# EAGLE board ring_mod_v0.1 (EAGLE 5.10)
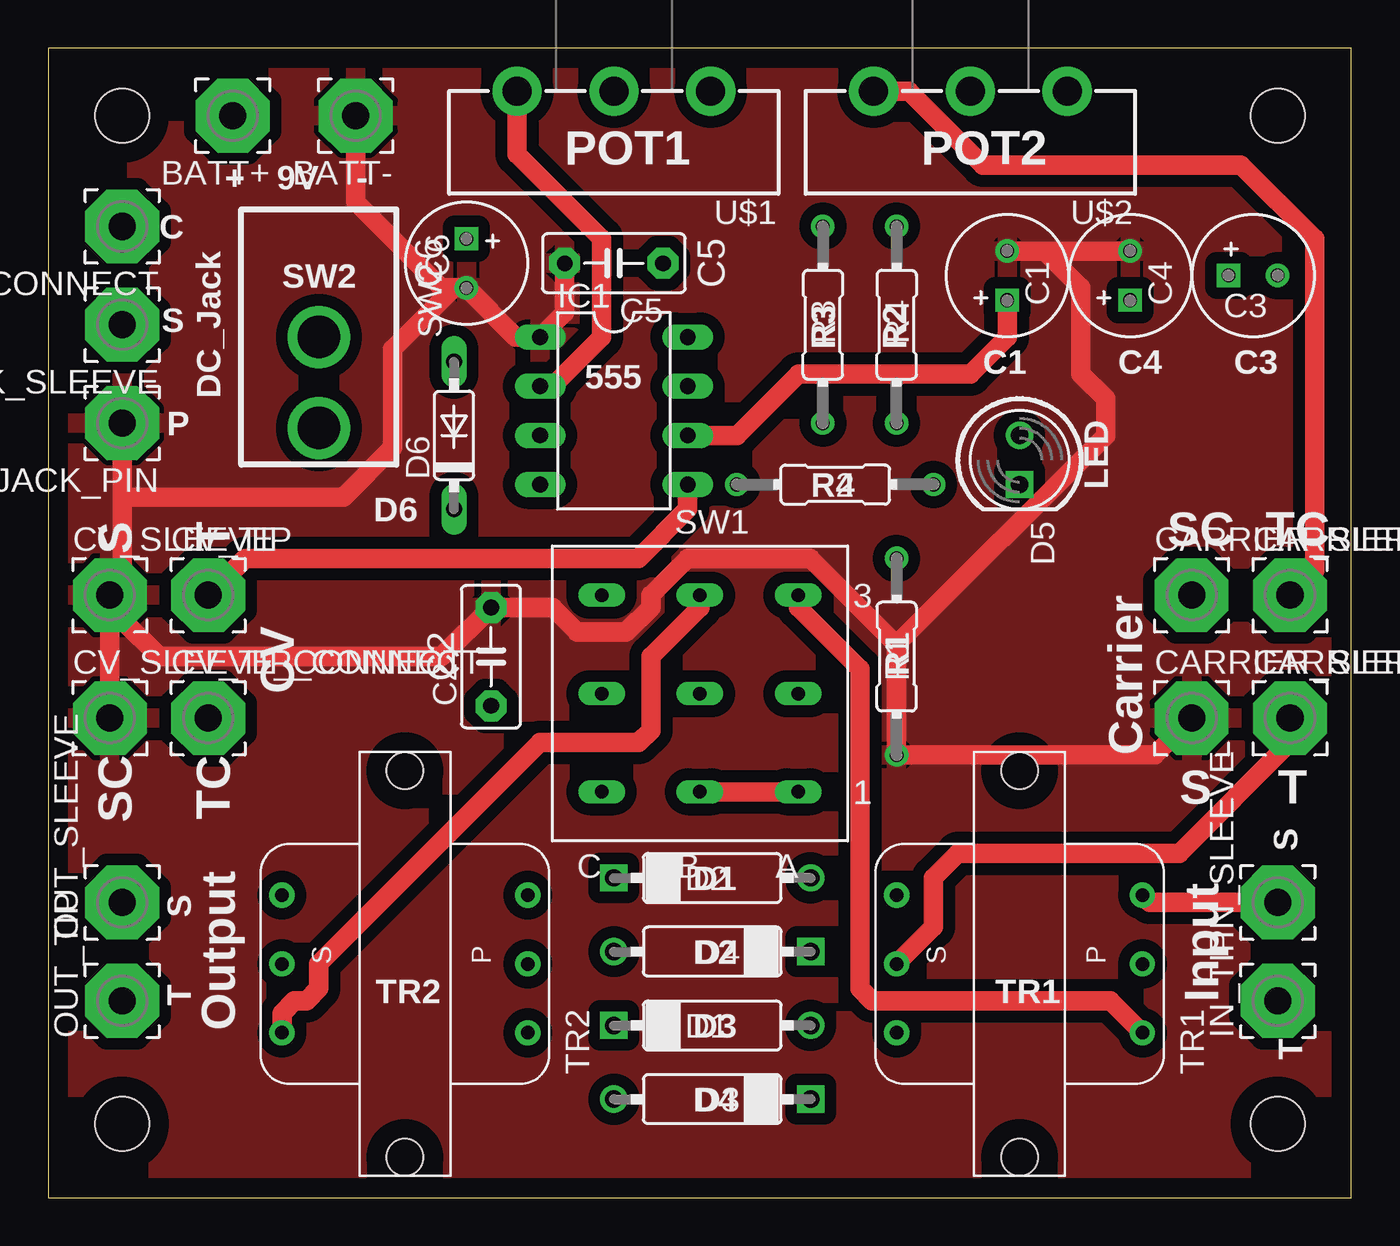
[diagram p0: board, top side]
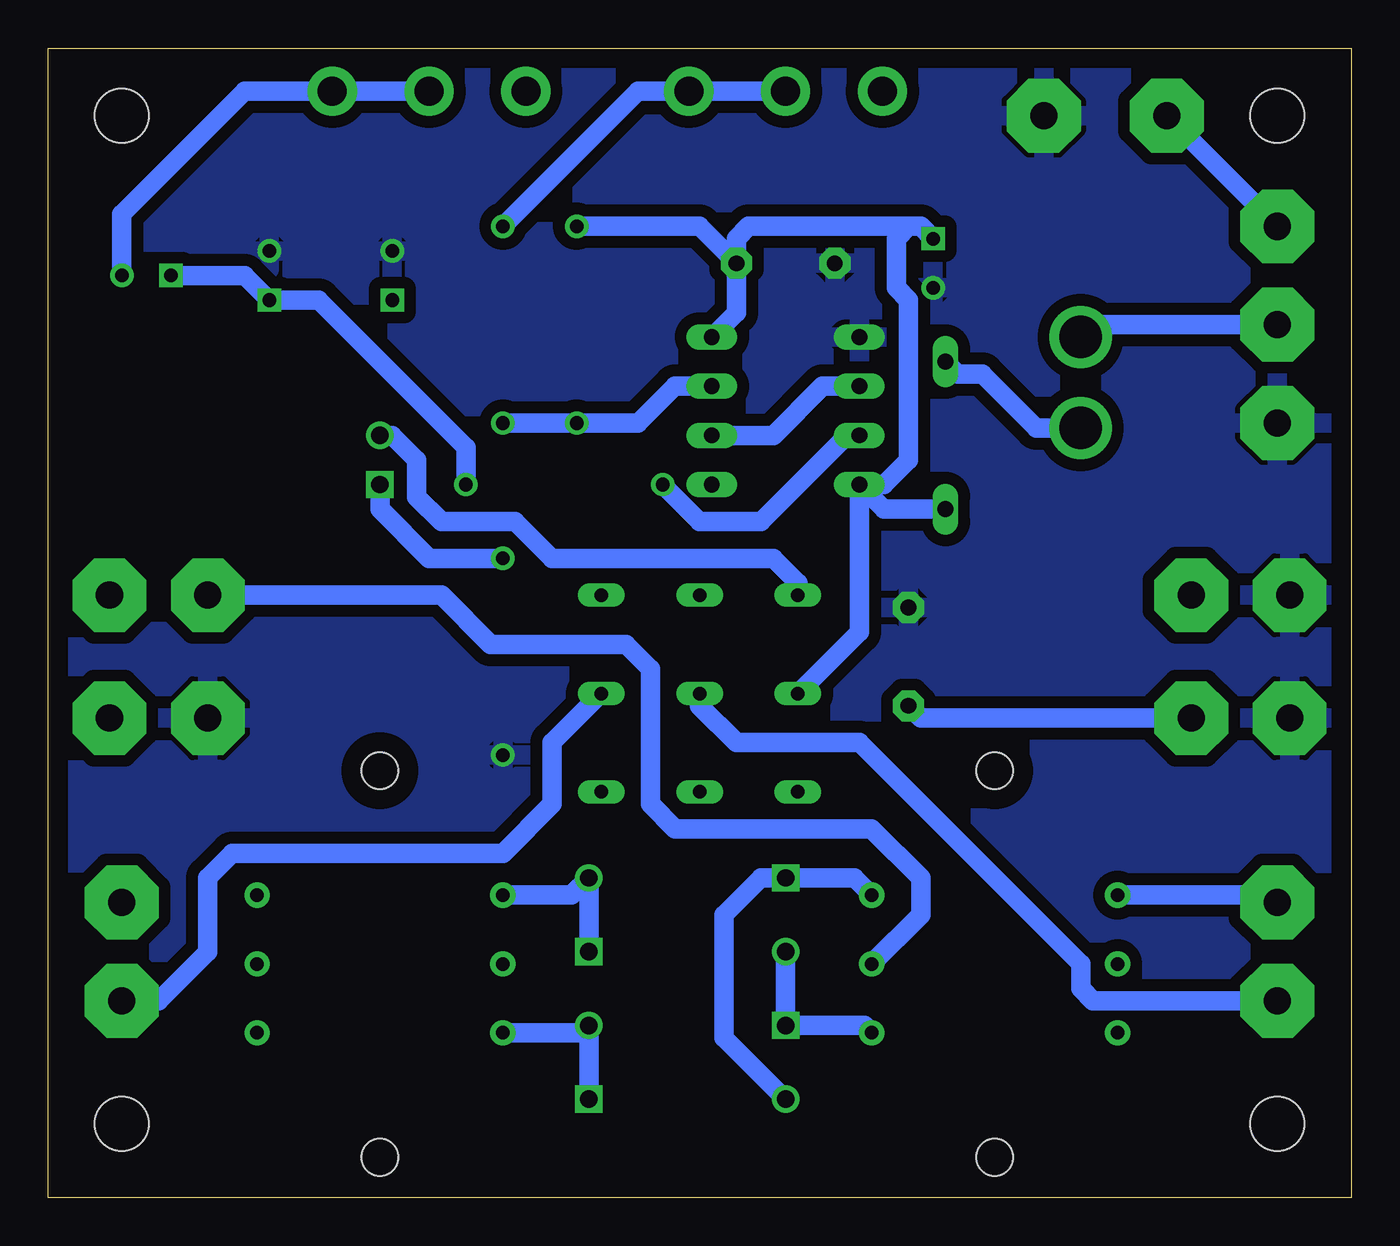
[diagram p1: board, bottom side, seen from below]

Size 67.29 x 59.36 mm. Coordinates in mm from the lower left corner, seen from the top.
Outline: 0,0 67.29,0 67.29,59.36 0,59.36 0,0
Copper layers (1*16): Top 0.035mm / dielectric 1.5mm / Bottom 0.035mm
Design rules "default": minimum track width 10mil, minimum drill 24mil, track to track 8mil, track to pad 8mil, pad to pad 8mil, via to via 8mil, smd to smd 8mil, copper to edge 40mil, drill to drill 8mil, minimum pad ring 10mil, minimum via ring 8mil, stop-mask expansion 4mil, vias tented up to drill 0mil, thermal gap 10mil
Holes 2.8 mm at 3.81,3.81 3.81,55.88 63.5,3.81 63.5,55.88

## Footprints (pad centres in the part's own frame; a part is rotated, then mirrored left to right if it is on the bottom)
3,81/1,4 = drill 1.397 pad 3.81 octagon: 1 0,0
063_025 = drill 0.7 square: + -1.27,0 | drill 0.7 round: - 1.27,0
C5B3 = drill 0.813 pad 1.6 octagon: 1 -2.54,0; 2 2.54,0
DO07 = drill 0.9 round: A 5.08,0 | drill 0.9 square: C -5.08,0
LED5MM = drill 0.9 round: A -1.27,0 | drill 0.9 square: K 1.27,0
DO35-7 = drill 0.813 long: A 3.81,0; C -3.81,0
DIL08 = drill 0.813 long: 1 -3.81,-3.81; 2 -1.27,-3.81; 3 1.27,-3.81; 4 3.81,-3.81; 5 3.81,3.81; 6 1.27,3.81; 7 -1.27,3.81; 8 -3.81,3.81
R0207/4 = drill 0.7 round: 1 -5.08,0; 2 5.08,0
3PDT = drill 0.7 long: A1 -5.08,5.08; A2 -5.08,0; A3 -5.08,-5.08; B1 0,5.08; B2 0,0; B3 0,-5.08; C1 5.08,5.08; C2 5.08,0; C3 5.08,-5.08
SPST_TOGGLE_SWITCH = drill 2.2 round: A 0,0; B 4.7,0
42TM = drill 0.7 pad 1.3 round: 1 -3.556,-6.35; 2 0,-6.35; 3 3.556,-6.35; 4 3.556,6.35; 5 0,6.35; 6 -3.556,6.35 | hole 1.9: -9.982,0; 9.982,0
POT_ALPHA_RV16AF-20 = drill 1.5 pad 2.54 round: 1 -5,0; 2 0,0; 3 5,0

## Placement (x,y rotation side)
BATT+  [3,81/1,4]  9.53,55.88 180 top
BATT-  [3,81/1,4]  15.88,55.88 180 top
C1  [063_025]  49.53,47.62 90 top
C2  [C5B3]  22.86,27.94 90 top
C3  [063_025]  62.23,47.62 0 top
C4  [063_025]  55.88,47.62 90 top
C5  [C5B3]  29.21,48.26 180 top
C6  [063_025]  21.59,48.26 270 top
CARRIER_SLEEVE  [3,81/1,4]  59.05,24.77 0 top
CARRIER_SLEEVE_CONNECT  [3,81/1,4]  59.05,31.11 0 top
CARRIER_TIP  [3,81/1,4]  64.14,24.77 0 top
CARRIER_TIP_CONNECT  [3,81/1,4]  64.14,31.11 0 top
CV_SLEEVE  [3,81/1,4]  3.17,31.11 0 top
CV_SLEEVE_CONNECT  [3,81/1,4]  3.17,24.77 0 top
CV_TIP  [3,81/1,4]  8.26,31.11 0 top
CV_TIP_CONNECT  [3,81/1,4]  8.26,24.77 0 top
D1  [DO07]  34.29,8.89 0 top
D2  [DO07]  34.29,16.51 0 top
D3  [DO07]  34.29,5.08 180 top
D4  [DO07]  34.29,12.7 180 top
D5  LED5MM  [LED5MM]  50.16,38.1 270 top
D6  1N4148DO35-7  [DO35-7]  20.95,39.37 90 top
DC_JACK_CONNECT  [3,81/1,4]  3.81,50.16 180 top
DC_JACK_PIN  [3,81/1,4]  3.81,40.01 180 top
DC_JACK_SLEEVE  [3,81/1,4]  3.81,45.09 180 top
IC1  ICM7555  [DIL08]  29.21,40.64 270 top
IN_SLEEVE  [3,81/1,4]  63.5,15.24 90 top
IN_TIP  [3,81/1,4]  63.5,10.16 90 top
OUT_SLEEVE  [3,81/1,4]  3.81,15.24 90 top
OUT_TIP  [3,81/1,4]  3.81,10.16 90 top
R1  [R0207/4]  43.81,27.94 90 top
R2  [R0207/4]  40.64,36.83 0 top
R3  [R0207/4]  40.01,45.09 270 top
R4  [R0207/4]  43.81,45.09 270 top
SW1  3PDT  [3PDT]  33.66,26.04 180 top
SW2  SPST_SWITCH  [SPST_TOGGLE_SWITCH]  13.97,44.45 270 top
TR1  42TM018  [42TM]  50.16,12.06 90 top
TR2  42TM018  [42TM]  18.41,12.06 90 top
U$1  [POT_ALPHA_RV16AF-20]  29.21,57.15 180 top
U$2  [POT_ALPHA_RV16AF-20]  47.62,57.15 180 top

## Library data of the parts
BATT+ BATT- CARRIER_SLEEVE CARRIER_SLEEVE_CONNECT CARRIER_TIP CARRIER_TIP_CONNECT CV_SLEEVE CV_SLEEVE_CONNECT CV_TIP CV_TIP_CONNECT DC_JACK_CONNECT DC_JACK_PIN DC_JACK_SLEEVE IN_SLEEVE IN_TIP OUT_SLEEVE OUT_TIP = wirepad
C1 C3 C4 C6 = gm-caps-electro-pol
C2 C5 = capacitor-wima
D1-D5 = gm-diodes
D6 = diode
IC1 = maxim
R1-R4 = gm-resistors
SW1 = gm-switches
SW2 = 00_steve
TR1 TR2 = trafo-xicon
U$1 U$2 = SparkFun

## Nets
GND: BATT-.1 C1.- C2.2 C4.- C5.2 C6.- CARRIER_SLEEVE.1 CV_SLEEVE.1 CV_SLEEVE_CONNECT.1 DC_JACK_PIN.1 IC1.1 R1.1
N$1: D1.A D3.C TR1.6
N$2: D1.C D4.A TR2.1
N$3: D2.C D3.A TR2.3
N$4: D2.A D4.C TR1.4
N$5: CARRIER_SLEEVE_CONNECT.1 TR2.2
N$6: CARRIER_TIP.1 TR1.5
N$7: IN_TIP.1 SW1.A2
N$8: OUT_TIP.1 SW1.B2
N$9: OUT_SLEEVE.1 TR2.4
N$10: SW1.B3 TR2.6
N$11: CARRIER_TIP_CONNECT.1 U$2.3
N$12: SW1.A3 TR1.1
N$13: IN_SLEEVE.1 TR1.3
N$14: D5.K R1.2
N$15: C1.+ IC1.2 IC1.6 U$1.3
N$16: CV_TIP.1 IC1.5
N$17: IC1.3 R2.1
N$18: IC1.7 R3.2 R4.2
N$19: C2.1 CV_TIP_CONNECT.1
N$20: C3.+ C4.+ R2.2
N$21: DC_JACK_SLEEVE.1 SW2.A
N$22: R4.1 U$1.1 U$1.2
N$23: BATT+.1 DC_JACK_CONNECT.1
N$24: D6.A SW2.B
N$25: C3.- U$2.1 U$2.2
N$26: D5.A SW1.C3
SIGNAL_BYPASS: SW1.A1 SW1.B1
VCC: C5.1 C6.+ D6.C IC1.4 IC1.8 R3.1 SW1.C2

## Tracks (layer width: path | path; a pad name or v marks a point on that pad's centre or on a via)
GND
  Top 1.016: 3.81,31.75 3.81,36.2 | 3.81,36.2 DC_JACK_PIN.1 | 3.81,31.75 CV_SLEEVE.1 CV_SLEEVE_CONNECT.1 | 3.81,31.75 3.81,29.84 5.71,27.94 20.32,27.94 C2.2 26.04,30.48 27.3,29.21 29.84,29.21 31.11,30.48 31.11,31.11 33.02,33.02 39.37,33.02 43.81,28.57 | C5.2 26.67,45.72 IC1.1 24.13,44.45 C6.- | C6.- 20.32,46.99 15.88,51.44 BATT-.1 | C4.- C1.- 51.44,48.9 53.34,46.99 53.34,42.55 54.61,41.27 54.61,39.37 43.81,28.57 | CARRIER_SLEEVE.1 57.15,22.86 R1.1 43.81,28.57 | C6.- 20.95,46.99 17.78,43.81 17.78,38.73 15.24,36.2 3.81,36.2
  pour Top (isolate 0.61): 0,59.05 67.31,59.05 67.31,0 0,0
  pour Bottom (isolate 0.61): 0.64,59.05 67.31,59.05 67.31,-0.64 0,-0.64 0,1.91 0,59.05
N$1
  Bottom 1.016: TR1.6 39.75,8.51 D1.A D3.C
N$2
  Bottom 1.016: D4.A D1.C 25.15,8.89 TR2.1
N$3
  Bottom 1.016: D3.A 32.38,8.26 32.38,14.61 30.48,16.51 D2.C 25.65,16.51 TR2.3
N$4
  Bottom 1.016: TR1.4 40.26,15.62 D2.A D4.C
N$5
  Bottom 1.016: CARRIER_SLEEVE_CONNECT.1 46.99,31.11 44.45,28.57 37.47,28.57 36.2,27.3 36.2,20.32 34.92,19.05 24.77,19.05 22.23,16.51 22.23,14.61 TR2.2
N$6
  Top 1.016: CARRIER_TIP.1 64.14,23.5 58.42,17.78 46.99,17.78 45.72,16.51 45.72,13.97 TR1.5
N$7
  Bottom 1.016: IN_TIP.1 61.59,10.16 59.05,12.7 59.05,16.51 57.78,17.78 43.81,17.78 41.27,20.32 41.27,23.5 SW1.A2
N$8
  Bottom 1.016: SW1.B2 33.66,25.4 31.75,23.5 25.4,23.5 13.97,12.06 13.97,10.79 13.34,10.16 OUT_TIP.1
N$9
  Bottom 1.016: TR2.4 4.19,15.62 OUT_SLEEVE.1
N$10
  Top 1.016: SW1.B3 33.66,30.48 31.11,27.94 31.11,24.13 30.48,23.5 25.4,23.5 13.97,12.06 13.97,10.79 13.34,10.16 12.7,10.16 12.06,9.53 TR2.6
N$11
  Top 1.016: U$2.3 44.45,57.15 48.26,53.34 61.59,53.34 65.41,49.53 65.41,32.38 CARRIER_TIP_CONNECT.1
N$12
  Top 1.016: SW1.A3 38.73,30.48 41.91,27.3 41.91,10.79 42.55,10.16 54.86,10.16 TR1.1
N$13
  Top 1.016: IN_SLEEVE.1 56.9,15.24 TR1.3
N$14
  Bottom 1.016: D5.K 50.16,35.56 47.62,33.02 R1.2
N$15
  Top 1.016: U$1.3 24.21,53.9 28.57,49.53 28.57,44.45 26.04,41.91 IC1.2 | IC1.6 35.56,39.37 38.73,42.55 47.62,42.55 49.53,44.45 C1.+
  Bottom 1.016: IC1.2 27.3,41.91 29.84,39.37 IC1.6
N$16
  Top 1.016: IC1.5 33.02,35.56 30.48,33.02 10.16,33.02 CV_TIP.1
N$17
  Bottom 1.016: IC1.3 26.04,39.37 30.48,34.92 33.66,34.92 R2.1
N$18
  Bottom 1.016: IC1.7 34.92,41.91 36.83,40.01 R3.2 R4.2
N$19
  Bottom 1.016: CV_TIP_CONNECT.1 22.23,24.77 C2.1
N$20
  Bottom 1.016: C3.+ 57.15,47.62 C4.+ 53.34,46.35 45.72,38.73 R2.2
N$21
  Bottom 1.016: DC_JACK_SLEEVE.1 13.34,45.09 SW2.A
N$22
  Bottom 1.016: U$1.2 U$1.1 36.83,57.15 R4.1
N$23
  Bottom 1.016: DC_JACK_CONNECT.1 BATT+.1
N$24
  Bottom 1.016: SW2.B 16.25,39.75 19.05,42.55 20.32,42.55 D6.A
N$25
  Bottom 1.016: U$2.2 U$2.1 57.15,57.15 63.5,50.8 C3.-
N$26
  Bottom 1.016: SW1.C3 28.57,31.75 29.84,33.02 41.27,33.02 43.18,34.92 46.99,34.92 48.26,36.2 48.26,38.1 49.53,39.37 D5.A
SIGNAL_BYPASS
  Top 1.016: SW1.B1 SW1.A1
VCC
  Bottom 1.016: D6.C 24.13,35.56 IC1.4 | C5.1 31.75,45.72 IC1.8 | C5.1 31.75,49.53 31.11,50.16 22.86,50.16 | 22.86,50.16 22.23,50.16 C6.+ | IC1.4 25.4,29.21 SW1.C2 | IC1.4 24.13,36.83 22.86,38.1 22.86,46.35 23.5,46.99 23.5,49.53 22.86,50.16 | R3.1 33.66,50.16 C5.1

## Text on the board
tPlace: + | 9V | - | POT1 | POT2 | C | SW2 | C6 | C5 | S | R3 | R2 | C3 | C1 | C4 | 555 | DC_Jack | P | LED | D6 | R4 | S | T | SC | TC | R1 | C2 | CV | SC | TC | Carrier | S | T | S | D1 | Input | S | D2 | T | TR2 | D3 | TR1 | Output | T | D4